# Altium PCB LED节能灯电路模块.PcbDoc
Units mm, origin at the board's own origin, x right, y up, seen from the top; angles counter-clockwise.
Board outline 152.4 x 101.6 mm, 2 copper layers (Top Layer, Bottom Layer); 10 components, 6 nets, 24 pads, 0 vias.
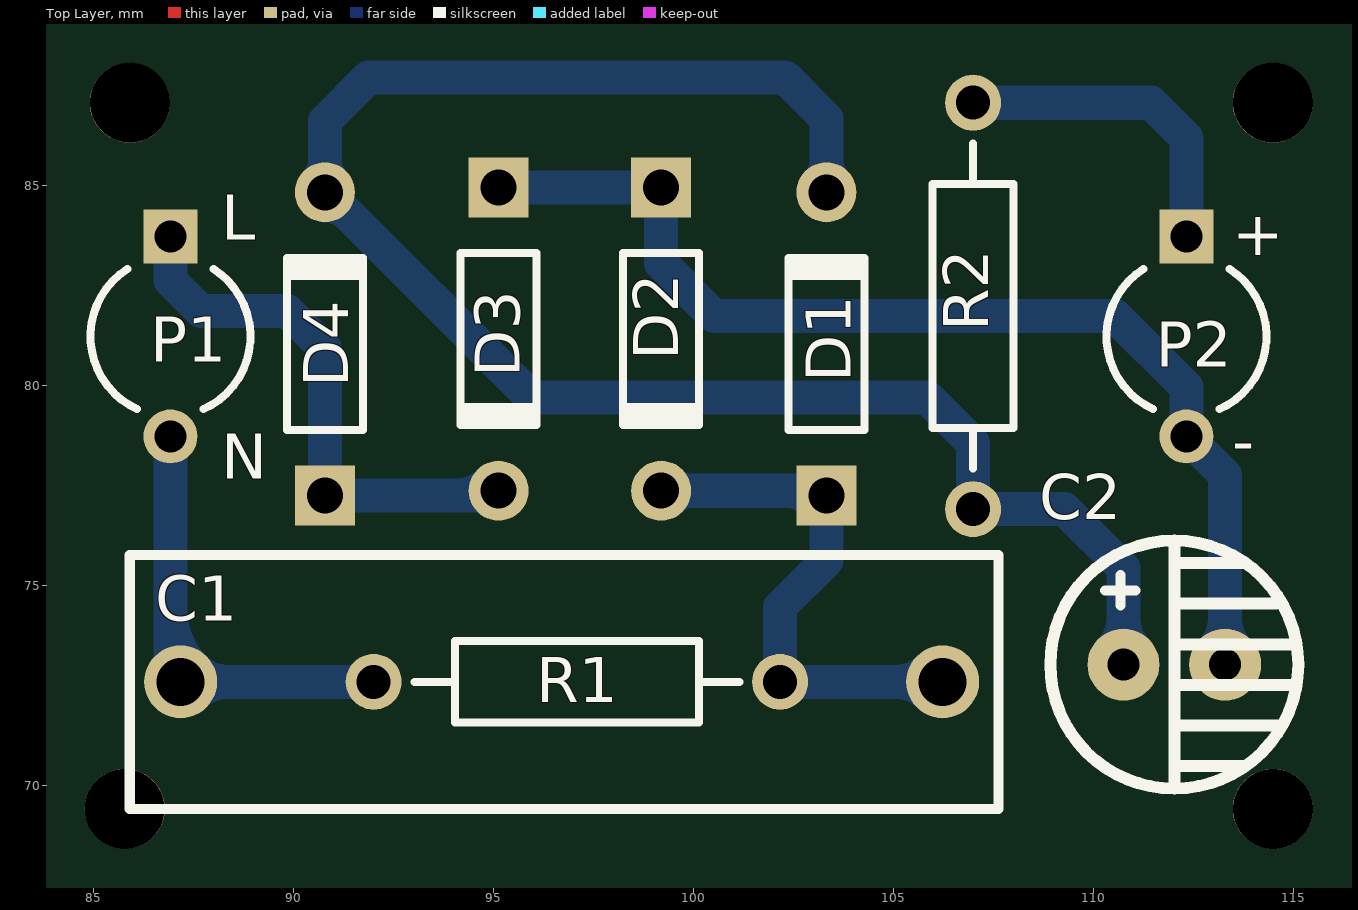
[diagram p0: Top Layer view]
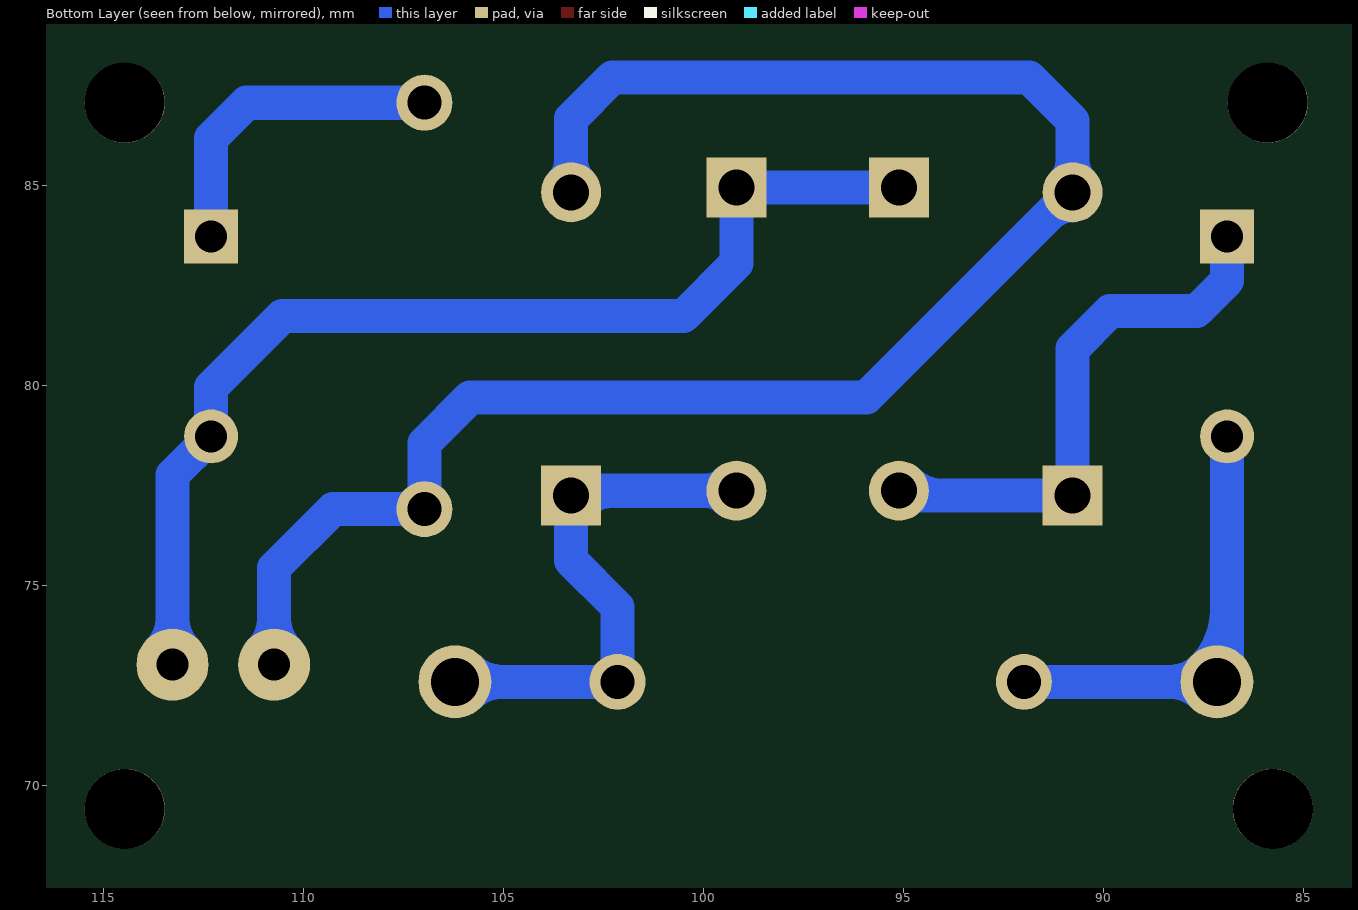
[diagram p1: Bottom Layer view, seen from below]

## Layer stack, top to bottom
Top Layer: signal copper 0.0356
Dielectric: dielectric 0.32, FR-4, Dk 4.8
Bottom Layer: signal copper 0.0356

## Board outline
25.4,25.4 177.8,25.4 177.8,127 25.4,127

## Design rules (kind name [scope] priority, off if disabled: settings)
Clearance [All] p1: gap=1.254
PolygonConnect [All] p1: connectstyle=Relief reliefconductorwidth=0.254 reliefentries=4 polygonreliefangle="90 Angle"
RoutingVias [All] p1: holewidth=0.711 width=1.27 viastyle="Through Hole" minholewidth=0.711 minwidth=1.27 maxholewidth=0.711 maxwidth=1.27
SilkscreenOverComponentPads [All] p1: minsilkscreentomaskgap=0.254
SolderMaskExpansion [All] p1: expansion=0.102
TestPointUsage [All] p1: valid=0 allowmultiple=FALSE
Testpoint [All] p1: side=15 testpointundercomponent=TRUE minsize=1.016 maxsize=2.54 preferedsize=1.524 minholesize=0 maxholesize=1.016 preferedholesize=0.813 testpointgrid=0.025 style=1023 order=0-112345678
Width [All] p1: maxlimit=0.854 minlimit=0.854 preferedwidth=0.854
23 further rules are at their usual default settings.

## Components (designator, comment, footprint, x,y, rotation, side; value= is the part's Value field where it differs from the comment)
C1 "250V/1UF" CP_CBB 90.475,72.593 r90 top
C2 "250V/4.7UF" C-DJ-6 113.335,73.101 r0 top
D1 "IN4007" D-ZL-10 103.267,84.785 r90 top
D2 "IN4007" D-ZL-10 99.238,77.419 r270 top
D3 "IN4007" D-ZL-10 95.174,77.419 r270 top
D4 "IN4007" D-ZL-10 90.729,84.785 r90 top
P1 "PZ_2" CAPR5-4X5 86.919,81.229 r270 top
P2 "PZ_2" CAPR5-4X5 112.319,81.229 r270 top
R1 "Res" AXIAL-0.4 97.079,72.593 r0 top
R2 "Res" AXIAL-0.4 106.985,81.991 r90 top

## Footprints (in the part's own frame and the unit in brackets; to place one, negate y for a bottom-side part, rotate by r counter-clockwise, add the part's x,y. Pads: shape width x height; smd on the part's side, far side on the other; paste and mask are expansions set on the pad)
AXIAL-0.4 [mm] "Resistor; 2 Leads"
  round 1.4 hole 0.85: 1(-5.08,0) 2(5.08,0)
  silkscreen extent -4.06,-1.02 4.06,1.02
C-DJ-6 [mm] "电容6mm"
  round 1.8 hole 0.8: 1(-2.591,-0.076) 2(-0.051,-0.076)
  silkscreen extent -4.42,-3.18 1.78,3.02
CAPR5-4X5 [mm] "Capacitor; 2 Leads"
  rect 1.35x1.35 hole 0.8: 1(-2.5,0)
  round 1.35 hole 0.8: 2(2.5,0)
  silkscreen extent -1.69,-2 1.82,2
CP_CBB [mm] "400V耐压电容"
  round 1.824 hole 1.2: 1(0,3.302) 2(0,-15.748)
  silkscreen extent -3.18,-17.14 3.18,4.57
D-ZL-10 [mm] "整流二极管"
  rect 1.5x1.5 hole 0.9: 1(-7.532,-0.051)
  round 1.5 hole 0.9: 2(0.048,-0.051)
  silkscreen extent -5.89,-1 -1.49,0.9

## Part data
C1: library part CPDR, "瓷片电容"
C2: library part DJDR, "电解电容"
D1 D2 D3 D4: library part ZL2JG, "整流二极管"
P1 P2: "排针——2"
R1 R2: "电阻"

## Free pads (board coordinates)
  round 2 hole 2: 2(85.903,87.071) 3(85.776,69.418) 4(114.478,69.418) 5(114.478,87.071)

## Nets (pads, with @x,y where several pads share a name; then routed paths per layer and width w, separated by ;. In a path a pad name is that pad's centre, name@x,y a point inside that pad or via, vN(x,y) a via of type N, cw(c..) or ccw(c..) an arc to the next point about the centre after c; other vN are vias at no path point)
NetC1_1: C1.1 P1.2 R1.1 | length 14.5
  Bottom Layer w0.854: 86.919,74.377 ccw(c88.957,74.377) 87.516,72.936 ccw(c88.344,73.764) 88.344,72.593 ccw(c88.344,71.422) C1.1@87.516,72.25 ; P1.2 86.919,72.847 C1.1 R1.1
NetC1_2: C1.2 D1.1 D2.2 R1.2 | length 18.6
  Bottom Layer w0.854: D2.2 103.201,77.371 D1.1 103.319,75.624 102.159,74.465 R1.2 C1.2 ; D2.2@99.415,77.143 cw(c99.966,76.591) 99.966,77.371 cw(c99.966,78.151) D2.2@99.415,77.599 ; 102.255,77.371 cw(c102.255,76.19) 103.09,77.025 cw(c102.539,76.474) 103.319,76.474 cw(c104.098,76.474) D1.1@103.547,77.025 ; C1.2@105.88,72.25 ccw(c105.052,71.422) 105.052,72.593 ccw(c105.052,73.764) C1.2@105.88,72.936
NetC2_1: C2.1 D1.2 D4.2 R2.1 | length 49.2
  Bottom Layer w0.854: D4.2@90.552,85.062 ccw(c90,85.613) 90.78,85.613 ccw(c91.56,85.613) D4.2@91.009,85.062 ; D4.2@90.78,84.51 cw(c90.78,83.664) 91.378,84.263 ; D1.2@103.09,85.062 ccw(c102.539,85.613) 103.319,85.613 ccw(c104.098,85.613) D1.2@103.547,85.062 ; D1.2 103.319,86.673 102.286,87.706 91.872,87.706 90.78,86.615 D4.2 90.808,84.833 95.936,79.705 105.842,79.705 106.985,78.562 R2.1 109.271,76.911 110.744,75.438 C2.1 ; C2.1@110.41,73.359 ccw(c109.602,74.167) 110.744,74.167 ccw(c111.886,74.167) C2.1@111.078,73.359
NetC2_2: C2.2 D2.1 D3.1 P2.2 | length 33.2
  Bottom Layer w0.854: D3.1 D2.1 99.186,83.059 100.508,81.737 110.541,81.737 112.319,79.959 P2.2 113.284,77.764 C2.2 ; D3.1@95.351,84.723 cw(c95.902,84.171) 95.902,84.951 cw(c95.902,85.731) D3.1@95.351,85.179 ; D2.1@98.958,85.179 cw(c98.407,85.731) 98.407,84.951 cw(c98.407,84.171) 98.958,84.723 cw(c98.407,84.171) 99.186,84.171 cw(c99.966,84.171) D2.1@99.415,84.723 ; C2.2@112.95,73.359 ccw(c112.142,74.167) 113.284,74.167 ccw(c114.426,74.167) C2.2@113.618,73.359
NetD3_2: D3.2 D4.1 P1.1 | length 17.1
  Bottom Layer w0.854: P1.1 86.919,82.626 87.681,81.864 89.84,81.864 90.78,80.924 D4.1 95.005,77.253 D3.2 ; D4.1@90.552,77.482 ccw(c90,78.033) 90.78,78.033 ccw(c91.56,78.033) 91.009,77.482 ccw(c91.56,78.033) 91.56,77.253 ccw(c91.56,76.474) D4.1@91.009,77.025 ; 94.059,77.253 ccw(c94.059,78.435) D3.2@94.894,77.599
NetP2_1: P2.1 R2.2 | length 8.2
  Bottom Layer w0.854: R2.2 111.43,87.071 112.319,86.182 P2.1

## Silkscreen, mask and mechanical layers (free items; w line width, h text height)
Top Overlay:
  text "L" at 88.189,83.642 h1.12
  text "+" at 113.462,83.261 h1.12
  text "-" at 113.462,78.054 h1.12
  text "N" at 88.189,77.673 h1.12
Mechanical 1:
  lines w0.254: 79.435,87.576 79.934,89.103 ; 79.544,68.907 80.061,67.386 ; 79.68,89.102 80.188,89.105 ; 79.807,67.385 80.315,67.388 ; 79.947,86.776 79.934,89.103 ; 80.047,69.713 80.061,67.386 ; 80.451,87.582 79.934,89.103 ; 80.56,68.913 80.061,67.386 ; 83.744,92.405 83.744,92.913 ; 85.268,92.151 83.744,92.659 ; 85.268,93.167 83.744,92.659 ; 92.103,92.659 83.744,92.659 ; 107.897,92.659 116.256,92.659 ; 114.732,92.151 116.256,92.659 ; 114.732,93.167 116.256,92.659 ; 116.256,92.405 116.256,92.913
  lines w0.5: 83.871,68.021 83.871,88.341 84.633,89.103 115.748,89.103 116.383,88.468 116.383,68.275 115.621,67.513 84.379,67.513 83.871,68.021
  text "32.512 (mm)" at 92.357,91.745 h1.52
  text "21.7174 (mm)" at 79.035,86.517 h1.52 r270.34